# EAGLE board basic-BOARD-SD (EAGLE 7.2.0)
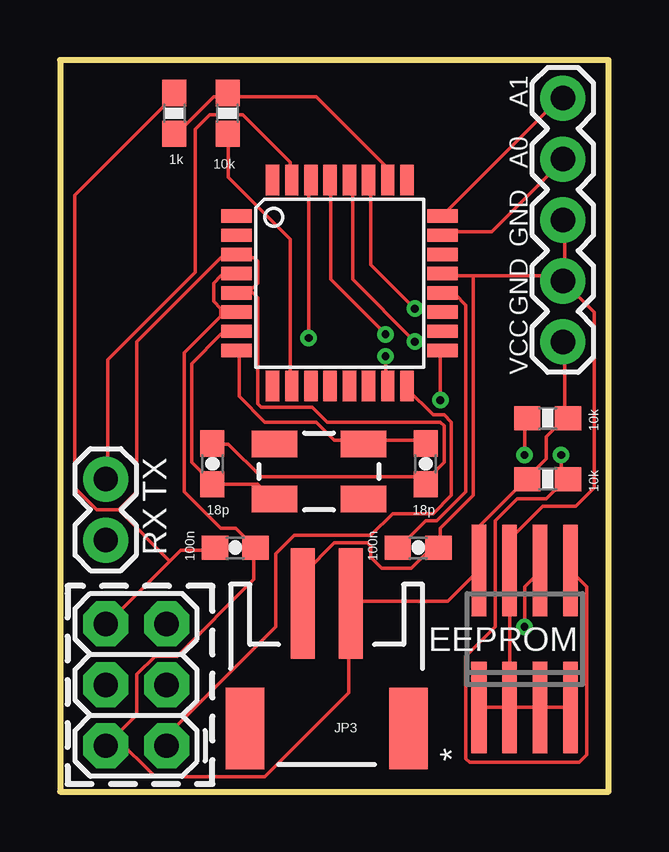
[diagram p0: board, top side]
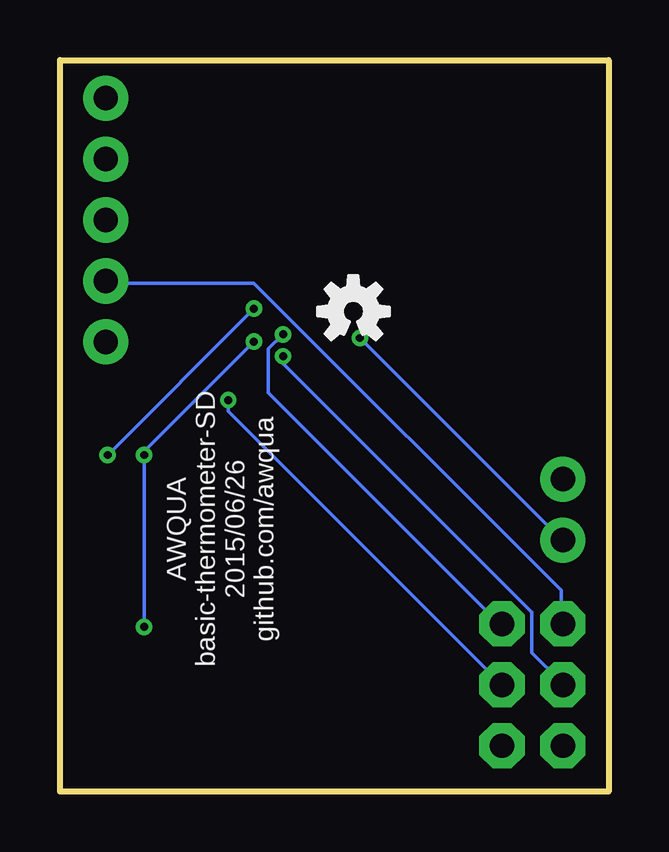
[diagram p1: board, bottom side, seen from below]

Size 22.86 x 30.48 mm. Coordinates in mm from the lower left corner, seen from the top.
Outline: 0,0 22.86,0 22.86,30.48 0,30.48 0,0
Copper layers (1*16): Top 0.0356mm / dielectric 1.5011mm / Bottom 0.0356mm
Design rules "default *": minimum track width 6mil, minimum drill 13mil, track to track 6mil, track to pad 6mil, pad to pad 6mil, via to via 6mil, smd to smd 6mil, copper to edge 15mil, drill to drill 6mil, minimum pad ring 7mil, minimum via ring 7mil, stop-mask expansion 4mil, vias tented up to drill 15mil, thermal gap 10mil

## Footprints (pad centres in the part's own frame; a part is rotated, then mirrored left to right if it is on the bottom)
0603-CAP = smd 1.1 x 1: 1 -0.85,0; 2 0.85,0
SOIC8-LONGPAD = smd 3.81 x 0.635: 1 -0.314,5.715 | smd 3.81 x 0.6: 2 -0.314,4.445; 3 -0.314,3.175; 4 -0.314,1.905; 5 5.394,1.905; 6 5.394,3.175; 7 5.394,4.445; 8 5.394,5.715
TQFP32-08 = smd 1.27 x 0.559: 1 -4.293,2.8; 2 -4.293,2; 3 -4.293,1.2; 4 -4.293,0.4; 5 -4.293,-0.4; 6 -4.293,-1.2; 7 -4.293,-2; 8 -4.293,-2.8; 17 4.293,-2.8; 18 4.293,-2; 19 4.293,-1.2; 20 4.293,-0.4; 21 4.293,0.4; 22 4.293,1.2; 23 4.293,2; 24 4.293,2.8 | smd 0.559 x 1.27: 9 -2.8,-4.293; 10 -2,-4.293; 11 -1.2,-4.293; 12 -0.4,-4.293; 13 0.4,-4.293; 14 1.2,-4.293; 15 2,-4.293; 16 2.8,-4.293; 25 2.8,4.293; 26 2,4.293; 27 1.2,4.293; 28 0.4,4.293; 29 -0.4,4.293; 30 -1.2,4.293; 31 -2,4.293; 32 -2.8,4.293
1X02 = drill 1.016 pad 1.88: 1 0,0; 2 2.54,0
2X3 = drill 1.016 pad 1.88 octagon: 1 0,0; 2 0,2.54; 3 2.54,0; 4 2.54,2.54; 5 5.08,0; 6 5.08,2.54
JST-2-SMD = smd 1 x 4.6: 1 -1,-3.7; 2 1,-3.7 | smd 1.6 x 3.4: NC1 -3.4,1.5; NC2 3.4,1.5
1X05 = drill 1.016 pad 1.88: 1 0,0; 2 2.54,0; 3 5.08,0; 4 7.62,0; 5 10.16,0
0603-RES = smd 1.1 x 1: 1 -0.85,0; 2 0.85,0
CRYSTAL-SMD-5X3 = smd 1.9 x 1.1: 1 -1.85,-1.15; 2 1.85,-1.15; 3 1.85,1.15; 4 -1.85,1.15

## Placement (x,y rotation side)
C1  18p  [0603-CAP]  6.35,13.65 270 top
C2  18p  [0603-CAP]  15.24,13.65 90 top
C5  100n  [0603-CAP]  14.92,10.16 180 top
C8  100n  [0603-CAP]  7.3,10.16 180 top
EEPROM  AT24C256  [SOIC8-LONGPAD]  23.18,3.81 90 top
FRAME1  FRAME-LETTER  [CREATIVE_COMMONS]  20.95,-7.62 0 top  (outside the outline)
IC1  MEGA8-AI  [TQFP32-08]  11.65,21.18 0 top
JP1  M02PTH  [1X02]  1.91,10.48 90 top
JP2  [2X3]  4.45,1.91 90 top
JP3  M02-JST-2MM-SMT  [JST-2-SMD]  11.11,4.13 180 top
JP4  [1X05]  20.95,28.89 270 top
R1  10k  [0603-RES]  6.99,28.26 90 top
R2  1k  [0603-RES]  4.76,28.26 270 top
R4  10k  [0603-RES]  20.32,13.02 0 top
R5  10k  [0603-RES]  20.32,15.56 180 top
U$1  [OSHW-LOGO-S]  10.64,20 0 bottom
Y1  [CRYSTAL-SMD-5X3]  10.79,13.34 180 top

## Library data of the parts
C1 C2 C5 C8 U$1 Y1 = SparkFun
EEPROM = open_source_turbidimeter
FRAME1 = SparkFun-Aesthetics
IC1 = atmel; MPN: ATMEGA8-16AU; OC_FARNELL: 9171371; OC_NEWARK: 73M8863
JP1 JP2 JP4 = SparkFun-Connectors
JP3 = SparkFun-Connectors; PROD_ID: CONN-08352
R1 R2 R4 R5 = SparkFun-Resistors

## Nets
ADC6: IC1.19
ADC7: IC1.22
AREF: C5.2 IC1.20
AVCC: IC1.18
GND: C1.1 C2.1 C5.1 C8.2 EEPROM.1 EEPROM.2 EEPROM.3 EEPROM.4 EEPROM.7 IC1.3 IC1.5 IC1.21 JP2.6 JP3.2 JP4.3 JP4.4 R2.1
MISO: IC1.16 JP2.1
MOSI: IC1.15 JP2.4
PB0: IC1.12
PB1: IC1.13
PC0: IC1.23 JP4.2
PC1: IC1.24 JP4.1
PC2: IC1.25
PC3: IC1.26 R1.2 R2.2
PD2: IC1.32
PD3: IC1.1
PD4: IC1.2
PD5: IC1.9
PD6: IC1.10 R1.1
PD7: IC1.11
Q1: C2.2 IC1.8 Y1.1
Q2: C1.2 IC1.7 Y1.3
RST: IC1.29 JP2.5
RX: IC1.30 JP1.1
SCK: IC1.17 JP2.3
SCL: EEPROM.6 IC1.28 R5.2
SDA: EEPROM.5 IC1.27 R4.2
SS: IC1.14
TX: IC1.31 JP1.2
VCC: C8.1 EEPROM.8 IC1.4 IC1.6 JP2.2 JP3.1 JP4.5 R4.1 R5.1

## Tracks (layer width: path | path; a pad name or v marks a point on that pad's centre or on a via)
AREF
  Top 0.152: C5.2 14.17,10.21 15.24,11.28 15.7,11.28 16.92,12.5 16.92,20.27 16.46,20.73 16,20.73 IC1.20
GND
  Top 0.152: 15.24,12.95 15.09,13.11 8.38,13.11 7.01,14.48 6.4,14.48 C1.1 | 7.92,20.88 7.47,20.88 IC1.5 7.92,20.88 | 7.92,20.88 8.23,21.18 8.23,22.1 8.08,22.25 7.47,22.25 IC1.3 7.32,22.25 6.71,22.25 3.2,18.75 3.2,12.5 2.44,11.73 | 4.57,9.6 1.98,7.01 JP2.6 | 4.57,9.6 5.03,10.06 6.4,10.06 C8.2 | 2.44,11.73 1.52,11.73 0.61,12.65 0.61,24.84 4.72,28.96 R2.1 | 4.57,9.6 2.44,11.73 | 15.24,12.95 16,13.72 16,15.24 15.85,15.39 11.12,15.39 10.52,16 8.38,16 8.23,16.15 8.23,20.57 7.92,20.88 | 15.24,12.95 C2.1 | EEPROM.4 21.18,3.5 20.12,3.5 EEPROM.3 19.96,3.5 18.75,3.5 | EEPROM.1 17.53,3.5 18.59,3.5 EEPROM.2 18.75,3.5 | 18.75,3.5 18.75,9.14 EEPROM.7 18.75,9.3 18.75,10.52 20.12,11.89 21.49,11.89 22.25,12.65 22.25,19.96 21.03,21.18 JP4.4 | JP3.2 10.21,7.92 10.21,9.14 11.43,10.36 12.8,10.36 12.95,10.21 12.95,9.75 13.41,9.3 14.63,9.3 15.39,10.06 15.7,10.06 C5.1 15.85,10.21 15.85,10.97 17.22,12.34 17.22,21.49 | 17.22,21.49 20.73,21.49 20.88,21.34 JP4.4 | 17.22,21.49 16,21.49 IC1.21 | JP4.3 21.03,23.77 21.03,21.34 JP4.4
  Bottom 0.152: JP2.6 1.98,7.01 1.98,8.38 14.78,21.18 20.88,21.18 JP4.4
MISO
  Top 0.152: IC1.16 14.48,16.76 15.54,15.7 16,15.7 16.31,15.39 16.31,12.34 15.54,11.58 13.87,11.58 12.95,10.67 9.75,10.67 8.99,9.91 8.99,6.86 4.57,2.44 4.57,1.98 JP2.1
MOSI  (via drill 0.33)
  Top 0.152: v13.56,18.14 13.56,16.92 IC1.15
  Bottom 0.152: v13.56,18.14 13.56,17.83 3.2,7.47 3.2,5.79 1.98,4.57 JP2.4
PC0
  Top 0.152: IC1.23 16,23.32 17.98,23.32 20.88,26.21 JP4.2
PC1
  Top 0.152: IC1.24 16,24.08 20.88,28.96 JP4.1
PC3
  Top 0.152: R2.2 4.88,27.43 6.4,28.96 6.86,28.96 R1.2 7.01,28.96 10.67,28.96 13.56,26.06 13.56,25.6 IC1.26
PD6
  Top 0.152: R1.1 7.01,27.28 7.01,25.6 9.6,23.01 9.6,16.92 IC1.10
Q1
  Top 0.152: C2.2 15.24,14.63 12.65,14.63 Y1.1 12.5,14.63 11.43,14.63 10.67,15.39 8.53,15.39 7.47,16.46 7.47,18.29 IC1.8
Q2
  Top 0.152: Y1.3 8.84,12.19 8.23,12.8 6.4,12.8 C1.2 6.25,12.95 5.49,13.72 5.49,17.83 6.71,19.05 7.32,19.05 IC1.7
RST  (via drill 0.33)
  Top 0.152: v13.56,19.05 11.28,21.34 11.28,25.45 IC1.29
  Bottom 0.152: v13.56,19.05 14.17,18.44 14.17,16.61 4.57,7.01 JP2.5
RX  (via drill 0.33)
  Top 0.152: v10.36,18.9 10.36,25.45 IC1.30
  Bottom 0.152: v10.36,18.9 1.98,10.52 JP1.1
SCK  (via drill 0.33)
  Top 0.152: v15.85,16.31 15.85,18.29 IC1.17
  Bottom 0.152: v15.85,16.31 15.85,15.85 JP2.3
SCL  (via drill 0.33)
  Top 0.152: v19.36,14.02 19.36,15.54 R5.2 | v19.36,6.86 19.36,8.53 19.96,9.14 EEPROM.6 | v14.78,18.75 12.19,21.34 12.19,25.45 IC1.28
  Bottom 0.152: v19.36,6.86 v19.36,14.02 19.36,14.17 v14.78,18.75
SDA  (via drill 0.33)
  Top 0.152: EEPROM.5 21.34,9.14 21.95,8.53 21.95,1.52 21.64,1.22 17.07,1.22 16.92,1.37 16.92,5.64 18.14,6.86 18.14,11.28 19.05,12.19 20.27,12.19 21.03,12.95 R4.2 21.03,13.11 20.88,13.26 v20.88,14.02 | v14.78,20.12 12.95,21.95 12.95,25.45 IC1.27
  Bottom 0.152: v20.88,14.02 v14.78,20.12
TX
  Top 0.152: IC1.31 9.6,25.6 9.6,26.21 7.62,28.19 6.25,28.19 5.64,27.58 5.64,21.64 1.98,17.98 1.98,13.11 JP1.2
VCC
  Top 0.152: JP4.5 21.03,18.59 21.03,15.7 R5.1 21.03,15.54 20.27,14.78 20.27,13.87 19.51,13.11 R4.1 19.36,12.95 17.53,11.12 17.53,9.3 EEPROM.8 17.37,9.14 16.15,7.92 12.19,7.92 JP3.1 12.04,7.77 12.04,4.12 8.53,0.61 3.96,0.61 2.29,2.29 | 6.71,20.12 7.32,20.12 IC1.6 | 6.71,20.12 6.4,20.42 6.4,21.18 6.71,21.49 7.32,21.49 IC1.4 | 2.29,2.29 JP2.2 1.98,1.98 | 2.29,2.29 3.2,3.2 3.2,4.88 3.96,5.64 4.88,5.64 8.08,8.84 8.08,10.06 C8.1 8.08,10.21 7.32,10.97 6.71,10.97 5.18,12.5 5.18,18.29 6.71,19.81 6.71,20.12

## Text on the board
bPlace: AWQUA / basic-thermometer-SD / 2015/06/26 / github.com/awqua
tNames: A1 | A0 | GND | GND | VCC | TX | RX | *